# EAGLE board MicroUSB Adapter (EAGLE 9.5.1)
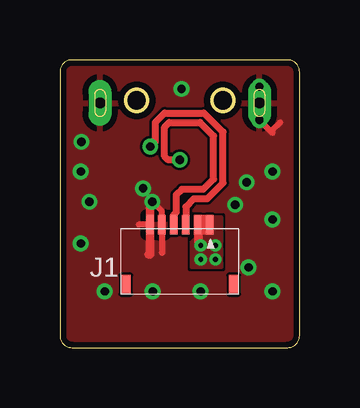
[diagram p0: board, top side]
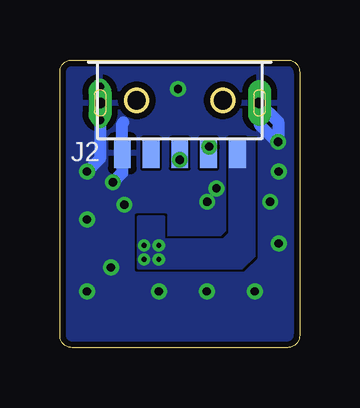
[diagram p1: board, bottom side, seen from below]

Size 10 x 12 mm. Coordinates in mm from the lower left corner, seen from the top.
Outline: 10,11.5 arc90 9.5,12 0.5,12 arc90 0,11.5 0,0.5 arc90 0.5,0 9.5,0 arc90 10,0.5 10,11.5
Copper layers (1*16): Top 0.035mm / dielectric 1.5mm / Bottom 0.035mm
Design rules "NOA Eagle Rule *": minimum track width 4mil, minimum drill 0.2mm, track to track 4mil, track to pad 4mil, pad to pad 4mil, via to via 4mil, smd to smd 0mil, copper to edge 10mil, drill to drill 10mil, minimum pad ring 10mil, minimum via ring 6mil, stop-mask expansion 2mil, vias tented up to drill 25mil, thermal gap 10mil
Net classes: 0 Normal: width 0.102 mm, drill 0.2 mm, clearance 0.102 mm; 2 Diff: width 0.293 mm, drill 0.2 mm, clearance 0.508 mm to class 0, clearance 0.508 mm to class 1, clearance 0.102 mm

## Footprints (pad centres in the part's own frame; a part is rotated, then mirrored left to right if it is on the bottom)
FH34RJ-6S = smd 0.3 x 0.8: 1 1.25,0; 2 0.75,0; 3 0.25,0; 4 -0.25,0; 5 -0.75,0; 6 -1.25,0 | smd 0.4 x 0.8: MH1 -2.25,-2.5; MH2 2.25,-2.5
U-G-M5WS-W-01 = smd 0.7 x 1.25: 1 -2.4,3.8; 2 -1.2,3.8; 3 0,3.8; 4 1.2,3.8; 5 2.4,3.8 | drill 0.45 long: P$6 -3.325,1.7; P$7 3.325,1.7

## Placement (x,y rotation side)
J1  FPC-0.5-6P-FH34RJ  [FH34RJ-6S]  5,5.13 0 top
J2  MICRO_USB_MALEU-G-M5WS-W-01  [U-G-M5WS-W-01]  5,11.91 180 bottom

## Library data of the parts
J1 = Connector_NOA
J2 = Connector

## Nets
D_N [Diff]: J1.3 J2.2
D_P [Diff]: J1.4 J2.3
GND: J1.5 J1.6 J2.5 J2.P$6 J2.P$7
VBUS: J1.1 J1.2 J2.1

## Tracks (layer width: path | path; a pad name or v marks a point on that pad's centre or on a via)
D_N  (via drill 0.35)
  Top 0.293: J1.3 5.25,5.87 5.58,6.2 6.14,6.2 6.8,6.87 6.8,8.99 6.01,9.79 4.37,9.79 3.97,9.4 3.97,8.59 v3.77,8.39
  Bottom 0.293: J2.2 3.77,8.13 v3.77,8.39
D_P  (via drill 0.35)
  Top 0.293: v5,7.83 4.52,7.83 4.37,7.98 4.37,9.21 4.55,9.39 5.85,9.39 6.41,8.83 6.41,7.03 5.98,6.6 5.09,6.6 4.85,6.36 4.85,5.64 4.75,5.53 J1.4
  Bottom 0.293: 4.97,7.85 v5,7.83 J2.3
GND  (via drill 0.35)
  Top 0.254: J1.6 3.28,5.13 | 4.28,3.96 4.25,3.96 J1.5 4.25,5.69 v3.86,6.08 | v8.32,9.49 8.87,8.95 8.87,9.07 9.19,9.39 | v0.9,8.58 0.87,8.61
  Top 0.356: v3.86,6.08 3.75,5.97 J1.6 3.75,3.88 3.69,3.88
  Bottom 0.508: v7.79,6.9 7.4,7.29 J2.5 7.4,9.34 7.35,9.39 | J2.P$7 8.32,7.88 v8.87,7.34 | 1.08,8.71 1.67,9.31 J2.P$6 0.9,9.43 v0.9,8.58
  other vias: 1.23,6.09 1.87,2.34 3.87,2.34 5.87,2.34 8.87,2.34 7.87,3.34 8.87,5.34 0.87,7.34 0.87,4.34 8.32,10.88 7.31,5.96 3.47,6.64 5.07,10.79
  pour Bottom (rank 2): -0.53,12.39 -0.53,-0.31 10.3,-0.31 10.3,12.39
  pour Top (rank 2): -0.98,12.39 -0.98,-0.31 10.3,-0.31 10.3,12.39
VBUS  (via drill 0.2)
  Top 0.293: J1.2 5.8,5.08 5.8,5.07
  Top 0.305: 5.8,5.07 6.18,5.07 | 6.18,4.87 5.8,4.87 | 5.82,5.38 6.21,5.38
  Top 0.356: 5.77,5.1 5.77,4.24 5.85,4.24 v5.88,4.26
  other vias: 6.49,4.26 6.49,3.68 5.88,3.68
  pour Bottom (no thermals): 1.91,8.66 1.91,3.83 2.42,3.32 6.71,3.32 6.71,5.46 5.67,5.46 5.67,4.49 3.18,4.49 2.9,4.77 2.9,8.66
  pour Top (no thermals): 5.65,5.46 5.65,4.57 5.49,4.41 5.49,3.35 6.74,3.35 6.74,5.46